# Altium PCB copper_suicide.PcbDoc (part 6 of 6)
Units mm, origin at the board's own origin, x right, y up, seen from the top; angles counter-clockwise.
Board outline 200 x 200 mm, 10 copper layers (Top Layer, Signal Layer 1, Signal Layer 2, Signal Layer 3, Signal Layer 4, Signal Layer 5, Signal Layer 6, Signal Layer 7, Signal Layer 8, Bottom Layer), stack 1.555 mm thick; 36 components, 3934 nets, 1640 pads, 0 vias.
Unrouted connection lines stored in the file: 671.
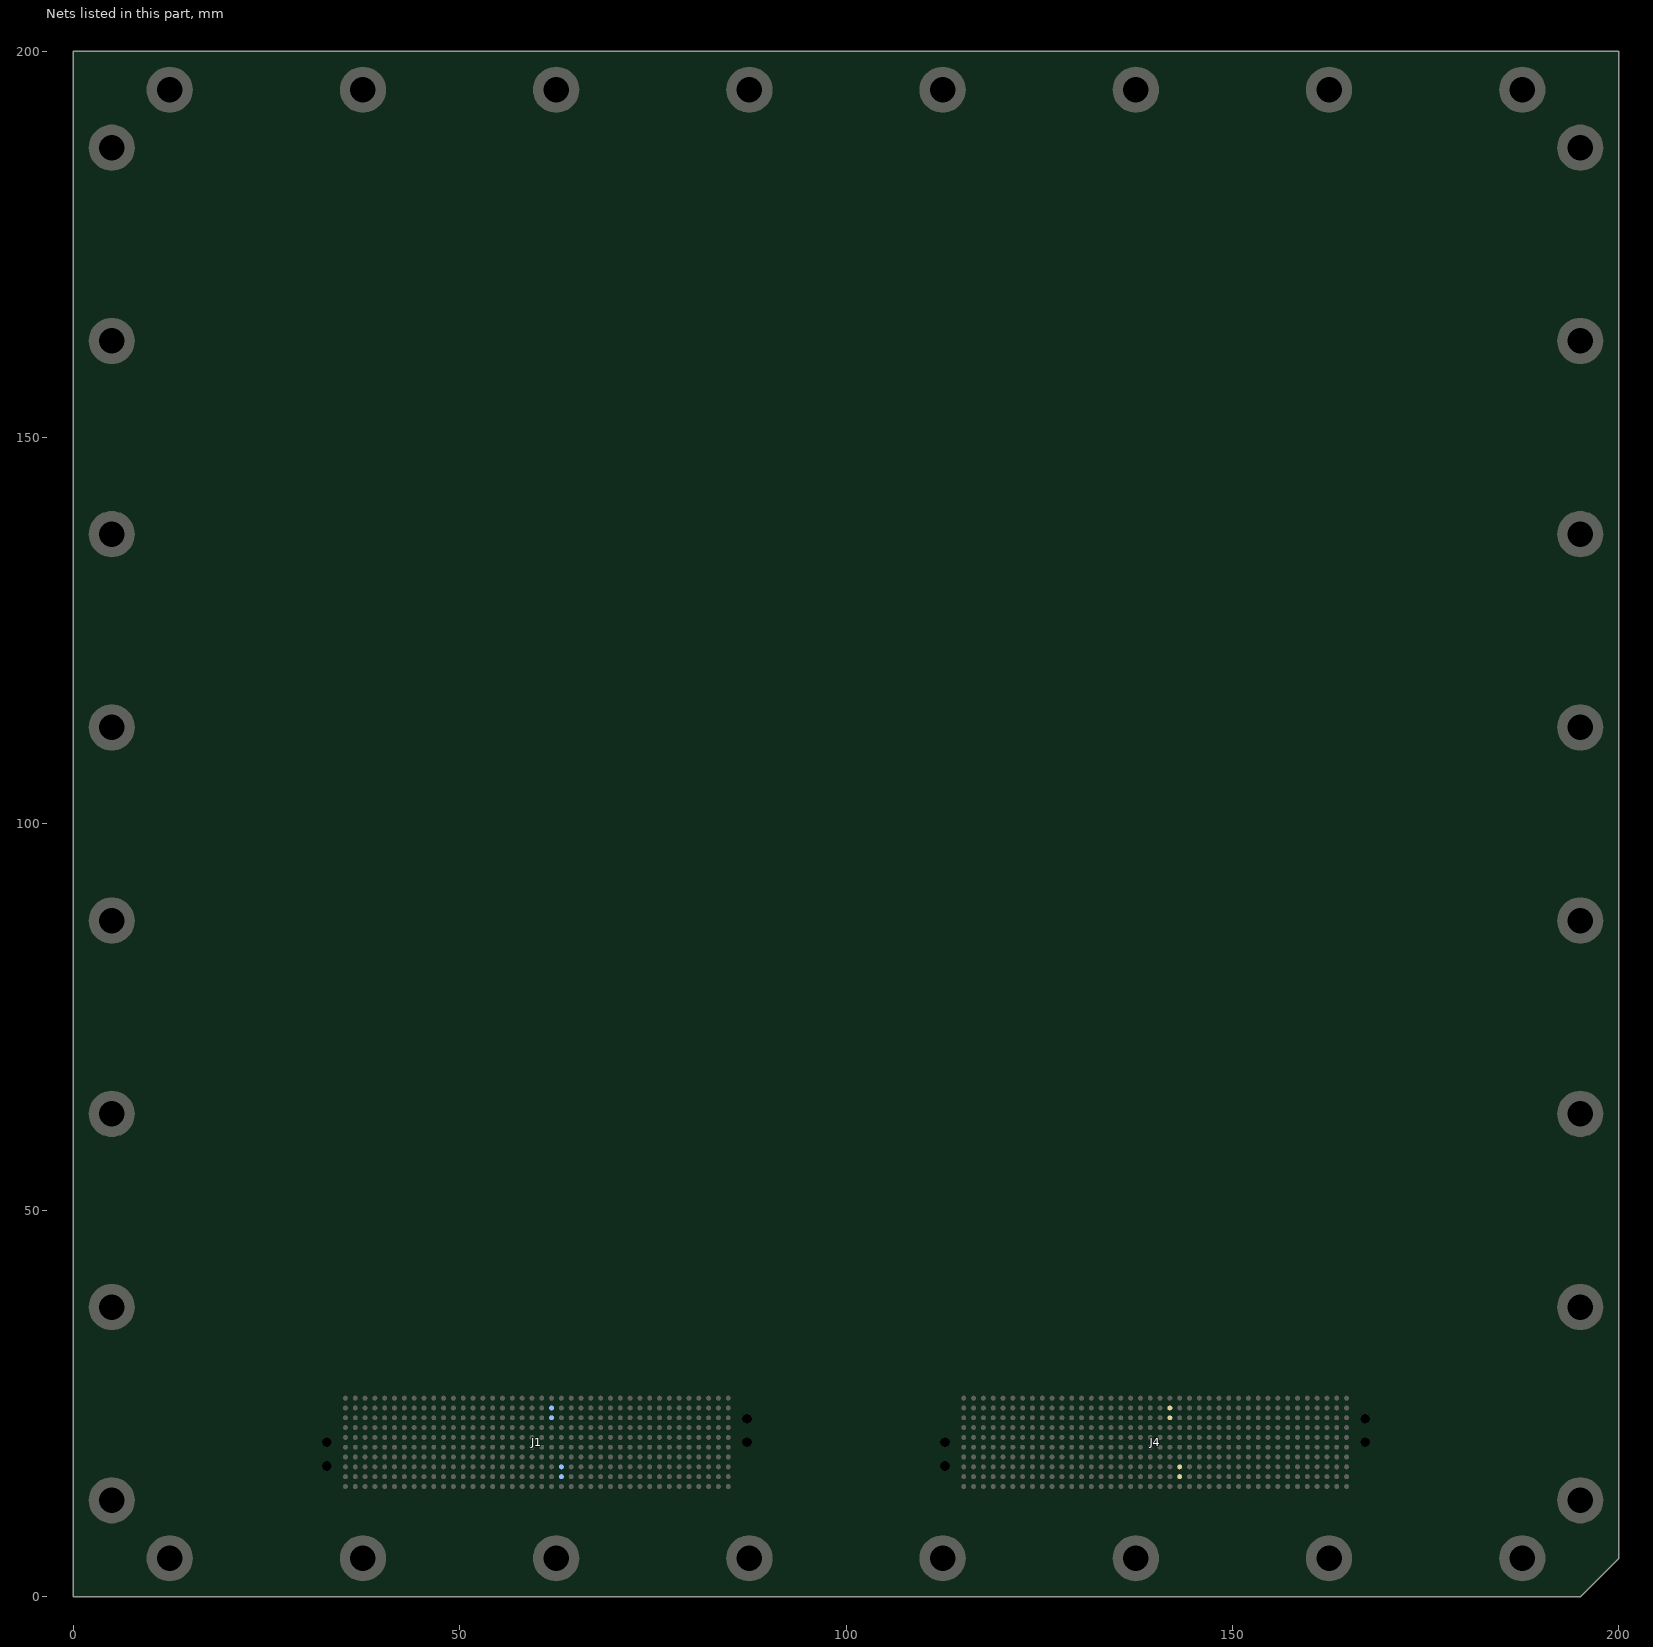
[diagram p6: the nets of this part, all layers, seen from the top]

## Nets (pads, with @x,y where several pads share a name; then routed paths per layer and width w, separated by ;. In a path a pad name is that pad's centre, name@x,y a point inside that pad or via, vN(x,y) a via of type N, cw(c..) or ccw(c..) an arc to the next point about the centre after c; other vN are vias at no path point) (continued)
L31.D5_5: 
L31.D6_5: 
L31.D7_5: 
L31.D8_5: 
L31.D9_5: 
L31.D10_5: 
L31.D11_5: 
L31.D12_5: 
L31.D13_5: 
L31.D14_5: 
L31.D15_5: 
L31.L_5_N: 
L31.L_5_P: 
L31.LDM_5: 
L31.U_5_N: 
L31.U_5_P: 
L31.UDM_5: 
L32.D0_5: 
L32.D1_5: 
L32.D2_5: 
L32.D3_5: 
L32.D4_5: 
L32.D5_5: 
L32.D6_5: 
L32.D7_5: 
L32.D8_5: 
L32.D9_5: 
L32.D10_5: 
L32.D11_5: 
L32.D12_5: 
L32.D13_5: 
L32.D14_5: 
L32.D15_5: 
L32.L_5_N: 
L32.L_5_P: 
L32.LDM_5: 
L32.U_5_N: 
L32.U_5_P: 
L32.UDM_5: 
L33.D0_5: 
L33.D1_5: 
L33.D2_5: 
L33.D3_5: 
L33.D4_5: 
L33.D5_5: 
L33.D6_5: 
L33.D7_5: 
L33.D8_5: 
L33.D9_5: 
L33.D10_5: 
L33.D11_5: 
L33.D12_5: 
L33.D13_5: 
L33.D14_5: 
L33.D15_5: 
L33.L_5_N: 
L33.L_5_P: 
L33.LDM_5: 
L33.U_5_N: 
L33.U_5_P: 
L33.UDM_5: 
LED0_35: 
LED0_37: 
LED0_56: 
LED0_57: 
LED0_58: 
LED0_59: 
LED0_60: 
LED0_61: 
LED0_62: 
LED0_63: 
LED0_64: 
LED0_65: 
LED0_66: 
LED0_67: 
LED0_68: 
LED0_69: 
LED1: 
LED1_35: 
LED1_37: 
LED1_56: 
LED1_57: 
LED1_58: 
LED1_59: 
LED1_60: 
LED1_61: 
LED1_62: 
LED1_63: 
LED1_64: 
LED1_65: 
LED1_66: 
LED1_67: 
LED1_68: 
LED1_69: 
LED2: 
LED2_35: 
LED2_37: 
LED2_56: 
LED2_57: 
LED2_58: 
LED2_59: 
LED2_60: 
LED2_61: 
LED2_62: 
LED2_63: 
LED2_64: 
LED2_65: 
LED2_66: 
LED2_67: 
LED2_68: 
LED2_69: 
LED3: 
LED3_35: 
LED3_37: 
LED3_56: 
LED3_57: 
LED3_58: 
LED3_59: 
LED3_60: 
LED3_61: 
LED3_62: 
LED3_63: 
LED3_64: 
LED3_65: 
LED3_66: 
LED3_67: 
LED3_68: 
LED3_69: 
LED4: 
LED4_35: 
LED4_37: 
LED4_56: 
LED4_57: 
LED4_58: 
LED4_59: 
LED4_60: 
LED4_61: 
LED4_62: 
LED4_63: 
LED4_64: 
LED4_65: 
LED4_66: 
LED4_67: 
LED4_68: 
LED4_69: 
LED5: 
LED5_35: 
LED5_37: 
LED5_56: 
LED5_57: 
LED5_58: 
LED5_59: 
LED5_60: 
LED5_61: 
LED5_62: 
LED5_63: 
LED5_64: 
LED5_65: 
LED5_66: 
LED5_67: 
LED5_68: 
LED5_69: 
LED6: 
LED6_35: 
LED6_37: 
LED6_56: 
LED6_57: 
LED6_58: 
LED6_59: 
LED6_60: 
LED6_61: 
LED6_62: 
LED6_63: 
LED6_64: 
LED6_65: 
LED6_66: 
LED6_67: 
LED6_68: 
LED6_69: 
LED7: 
LED7_35: 
LED7_37: 
LED7_56: 
LED7_57: 
LED7_58: 
LED7_59: 
LED7_60: 
LED7_61: 
LED7_62: 
LED7_63: 
LED7_64: 
LED7_65: 
LED7_66: 
LED7_67: 
LED7_68: 
LED7_69: 
LED8: 
LED8_35: 
LED8_37: 
LED8_56: 
LED8_57: 
LED8_58: 
LED8_59: 
LED8_60: 
LED8_61: 
LED8_62: 
LED8_63: 
LED8_64: 
LED8_65: 
LED8_66: 
LED8_67: 
LED8_68: 
LED8_69: 
LOCALCLK_35: 
LOCALCLK_37: 
LOCALCLK_56: 
LOCALCLK_57: 
LOCALCLK_58: 
LOCALCLK_59: 
LOCALCLK_60: 
LOCALCLK_61: 
LOCALCLK_62: 
LOCALCLK_63: 
LOCALCLK_64: 
LOCALCLK_65: 
LOCALCLK_66: 
LOCALCLK_67: 
LOCALCLK_68: 
LOCALCLK_69: 
MCLK.C_5_N: J4.219
MCLK.C_5_P: J4.218
MCLK_25: 
NetC5_2: 
NetC6_1: 
NetC8_1: 
NetC9_2: 
NetC17_2: 
NetC60_2: 
NetC63_1: 
NetC81_1: 
NetC81_2: 
NetC82_1: 
NetC82_2: 
NetC83_2: 
NetC88_2: 
NetC93_1: 
NetC93_2: 
NetC94_1: 
NetC95_2: 
NetC97_1: 
NetC97_2: 
NetC98_1: 
NetC98_2: 
NetC100_1: 
NetC101_1: 
NetC103_1: 
NetC104_1: 
NetC105A_2: 
NetC105B_2: 
NetC105C_2: 
NetC105D_2: 
NetC105E_2: 
NetC105F_2: 
NetC105G_2: 
NetC105H_2: 
NetC105I_2: 
NetC105J_2: 
NetC105K_2: 
NetC105L_2: 
NetC105M_2: 
NetC105N_2: 
NetC105O_2: 
NetC105P_2: 
NetC142A_1: 
NetC142B_1: 
NetC142C_1: 
NetC142D_1: 
NetC142E_1: 
NetC142F_1: 
NetC142G_1: 
NetC142H_1: 
NetC142I_1: 
NetC142J_1: 
NetC142K_1: 
NetC142L_1: 
NetC142M_1: 
NetC142N_1: 
NetC142O_1: 
NetC142P_1: 
NetC189_2: 
NetC198_2: 
NetC211_1: 
NetC212_2: 
NetC221_2: 
NetC230_2: 
NetC239_2: 
NetC248_2: 
NetC257_2: 
NetC266_2: 
NetC275_2: 
NetC284_2: 
NetC293_2: 
NetC302_2: 
NetC311_2: 
NetC320_2: 
NetC329_2: 
NetD1A_1: 
NetD1A_2: 
NetD1B_1: 
NetD1B_2: 
NetD1C_1: 
NetD1C_2: 
NetD1D_1: 
NetD1D_2: 
NetD1E_1: 
NetD1E_2: 
NetD1F_1: 
NetD1F_2: 
NetD1G_1: 
NetD1G_2: 
NetD1H_1: 
NetD1H_2: 
NetD1I_1: 
NetD1I_2: 
NetD1J_1: 
NetD1J_2: 
NetD1K_1: 
NetD1K_2: 
NetD1L_1: 
NetD1L_2: 
NetD1M_1: 
NetD1M_2: 
NetD1N_1: 
NetD1N_2: 
NetD1O_1: 
NetD1O_2: 
NetD1P_1: 
NetD1P_2: 
NetD1Q_1: 
NetD1Q_2: 
NetD2A_1: 
NetD2A_2: 
NetD2B_1: 
NetD2B_2: 
NetD2C_1: 
NetD2C_2: 
NetD2D_1: 
NetD2D_2: 
NetD2E_1: 
NetD2E_2: 
NetD2F_1: 
NetD2F_2: 
NetD2G_1: 
NetD2G_2: 
NetD2H_1: 
NetD2H_2: 
NetD2I_1: 
NetD2I_2: 
NetD2J_1: 
NetD2J_2: 
NetD2K_1: 
NetD2K_2: 
NetD2L_1: 
NetD2L_2: 
NetD2M_1: 
NetD2M_2: 
NetD2N_1: 
NetD2N_2: 
NetD2O_1: 
NetD2O_2: 
NetD2P_1: 
NetD2P_2: 
NetD2Q_1: 
NetD2Q_2: 
NetD3A_1: 
NetD3A_2: 
NetD3B_1: 
NetD3B_2: 
NetD3C_1: 
NetD3C_2: 
NetD3D_1: 
NetD3D_2: 
NetD3E_1: 
NetD3E_2: 
NetD3F_1: 
NetD3F_2: 
NetD3G_1: 
NetD3G_2: 
NetD3H_1: 
NetD3H_2: 
NetD3I_1: 
NetD3I_2: 
NetD3J_1: 
NetD3J_2: 
NetD3K_1: 
NetD3K_2: 
NetD3L_1: 
NetD3L_2: 
NetD3M_1: 
NetD3M_2: 
NetD3N_1: 
NetD3N_2: 
NetD3O_1: 
NetD3O_2: 
NetD3P_1: 
NetD3P_2: 
NetD3Q_1: 
NetD3Q_2: 
NetD4A_1: 
NetD4A_2: 
NetD4B_1: 
NetD4B_2: 
NetD4C_1: 
NetD4C_2: 
NetD4D_1: 
NetD4D_2: 
NetD4E_1: 
NetD4E_2: 
NetD4F_1: 
NetD4F_2: 
NetD4G_1: 
NetD4G_2: 
NetD4H_1: 
NetD4H_2: 
NetD4I_1: 
NetD4I_2: 
NetD4J_1: 
NetD4J_2: 
NetD4K_1: 
NetD4K_2: 
NetD4L_1: 
NetD4L_2: 
NetD4M_1: 
NetD4M_2: 
NetD4N_1: 
NetD4N_2: 
NetD4O_1: 
NetD4O_2: 
NetD4P_1: 
NetD4P_2: 
NetD4Q_1: 
NetD4Q_2: 
NetD5A_1: 
NetD5A_2: 
NetD5B_1: 
NetD5B_2: 
NetD5C_1: 
NetD5C_2: 
NetD5D_1: 
NetD5D_2: 
NetD5E_1: 
NetD5E_2: 
NetD5F_1: 
NetD5F_2: 
NetD5G_1: 
NetD5G_2: 
NetD5H_1: 
NetD5H_2: 
NetD5I_1: 
NetD5I_2: 
NetD5J_1: 
NetD5J_2: 
NetD5K_1: 
NetD5K_2: 
NetD5L_1: 
NetD5L_2: 
NetD5M_1: 
NetD5M_2: 
NetD5N_1: 
NetD5N_2: 
NetD5O_1: 
NetD5O_2: 
NetD5P_1: 
NetD5P_2: 
NetD5Q_1: 
NetD5Q_2: 
NetD6A_1: 
NetD6A_2: 
NetD6B_1: 
NetD6B_2: 
NetD6C_1: 
NetD6C_2: 
NetD6D_1: 
NetD6D_2: 
NetD6E_1: 
NetD6E_2: 
NetD6F_1: 
NetD6F_2: 
NetD6G_1: 
NetD6G_2: 
NetD6H_1: 
NetD6H_2: 
NetD6I_1: 
NetD6I_2: 
NetD6J_1: 
NetD6J_2: 
NetD6K_1: 
NetD6K_2: 
NetD6L_1: 
NetD6L_2: 
NetD6M_1: 
NetD6M_2: 
NetD6N_1: 
NetD6N_2: 
NetD6O_1: 
NetD6O_2: 
NetD6P_1: 
NetD6P_2: 
NetD6Q_1: 
NetD6Q_2: 
NetD7A_1: 
NetD7A_2: 
NetD7B_1: 
NetD7B_2: 
NetD7C_1: 
NetD7C_2: 
NetD7D_1: 
NetD7D_2: 
NetD7E_1: 
NetD7E_2: 
NetD7F_1: 
NetD7F_2: 
NetD7G_1: 
NetD7G_2: 
NetD7H_1: 
NetD7H_2: 
NetD7I_1: 
NetD7I_2: 
NetD7J_1: 
NetD7J_2: 
NetD7K_1: 
NetD7K_2: 
NetD7L_1: 
NetD7L_2: 
NetD7M_1: 
NetD7M_2: 
NetD7N_1: 
NetD7N_2: 
NetD7O_1: 
NetD7O_2: 
NetD7P_1: 
NetD7P_2: 
NetD7Q_1: 
NetD7Q_2: 
NetD8A_1: 
NetD8A_2: 
NetD8B_1: 
NetD8B_2: 
NetD8C_1: 
NetD8C_2: 
NetD8D_1: 
NetD8D_2: 
NetD8E_1: 
NetD8E_2: 
NetD8F_1: 
NetD8F_2: 
NetD8G_1: 
NetD8G_2: 
NetD8H_1: 
NetD8H_2: 
NetD8I_1: 
NetD8I_2: 
NetD8J_1: 
NetD8J_2: 
NetD8K_1: 
NetD8K_2: 
NetD8L_1: 
NetD8L_2: 
NetD8M_1: 
NetD8M_2: 
NetD8N_1: 
NetD8N_2: 
NetD8O_1: 
NetD8O_2: 
NetD8P_1: 
NetD8P_2: 
NetD8Q_1: 
NetD8Q_2: 
NetF2_2: 
NetL3_1: 
NetL6A_1: 
NetL6B_1: 
NetL6C_1: 
NetL6D_1: 
NetL6E_1: 
NetL6F_1: 
NetL6G_1: 
NetL6H_1: 
NetL6I_1: 
NetL6J_1: 
NetL6K_1: 
NetL6L_1: 
NetL6M_1: 
NetL6N_1: 
NetL6O_1: 
NetL6P_1: 
NetL7_1: 
NetNT1_2: 
NetQ1_4: 
NetR14_1: 
NetR18_1: 
NetR19_1: 
NetR20_1: 
NetR29_1: 
NetR32_2: 
NetR34_2: 
NetR38_1: 
NetR39_1: 
NetR41_1: 
NetR52_1: 
NetR60A_1: 
NetR60B_1: 
NetR60C_1: 
NetR60D_1: 
NetR60E_1: 
NetR60F_1: 
NetR60G_1: 
NetR60H_1: 
NetR60I_1: 
NetR60J_1: 
NetR60K_1: 
NetR60L_1: 
NetR60M_1: 
NetR60N_1: 
NetR60O_1: 
NetR60P_1: 
NetR62_2: 
NetR71_1: 
NetR72_1: 
NetR73_1: 
NetR78_2: 
NetR87_1: 
NetR88_1: 
NetR89_1: 
NetR106_2: 
NetR115_1: 
NetR116_1: 
NetR117_1: 
NetR122_2: 
NetR131_1: 
NetR132_1: 
NetR133_1: 
NetR138_2: 
NetR147_1: 
NetR148_1: 
NetR149_1: 
NetR154_2: 
NetR163_1: 
NetR164_1: 
NetR165_1: 
NetR170_2: 
NetR179_1: 
NetR180_1: 
NetR181_1: 
NetR186_2: 
NetR195_1: 
NetR196_1: 
NetR197_1: 
NetR202_2: 
NetR211_1: 
NetR212_1: 
NetR213_1: 
NetR218_2: 
NetR227_1: 
NetR228_1: 
NetR229_1: 
NetR234_2: 
NetR243_1: 
NetR244_1: 
NetR245_1: 
NetR250_2: 
NetR259_1: 
NetR260_1: 
NetR261_1: 
NetR266_2: 
NetR275_1: 
NetR276_1: 
NetR277_1: 
NetR282_2: 
NetR291_1: 
NetR292_1: 
NetR293_1: 
NetR298_2: 
NetR307_1: 
NetR308_1: 
NetR309_1: 
NetR314_2: 
NetR323_1: 
NetR324_1: 
NetR325_1: 
NetU4_AK5: 
NetU4_AM5: 
OBCLK_17_N: 
OBCLK_17_P: 
ONBDOSCEN: 
PGOOD-5V_33: 
PROGN_5: J1.222
RFB: 
RST00_5_N: 
RST01_5_N: 
RST02_5_N: 
RST03_5_N: 
RST10_5_N: 
RST11_5_N: 
RST12_5_N: 
RST13_5_N: 
RST20_5_N: 
RST21_5_N: 
RST22_5_N: 
RST23_5_N: 
RST30_5_N: 
RST31_5_N: 
RST32_5_N: 
RST33_5_N: 
RSTI2_5_N: 
RSTI_5_N: J4.222
RSTO.RST16_5: J1.223
SCLK.C_5_N: J1.219
SCLK.C_5_P: J1.218
SOFT-RESET_6: J4.223
TPSVDD_33: 
U00.D0_5: 
U00.D1_5: 
U00.D2_5: 
U00.D3_5: 
U00.D4_5: 
U00.D5_5: 
U00.D6_5: 
U00.D7_5: 
U00.D8_5: 
U00.D9_5: 
U00.D10_5: 
U00.D11_5: 
U00.D12_5: 
U00.D13_5: 
U00.D14_5: 
U00.D15_5: 
U00.L_5_N: 
U00.L_5_P: 
U00.LDM_5: 
U00.U_5_N: 
U00.U_5_P: 
U00.UDM_5: 
U01.D0_5: 
U01.D1_5: 
U01.D2_5: 
U01.D3_5: 
U01.D4_5: 
U01.D5_5: 
U01.D6_5: 
U01.D7_5: 
U01.D8_5: 
U01.D9_5: 
U01.D10_5: 
U01.D11_5: 
U01.D12_5: 
U01.D13_5: 
U01.D14_5: 
U01.D15_5: 
U01.L_5_N: 
U01.L_5_P: 
U01.LDM_5: 
U01.U_5_N: 
U01.U_5_P: 
U01.UDM_5: 
U02.D0_5: 
U02.D1_5: 
U02.D2_5: 
U02.D3_5: 
U02.D4_5: 
U02.D5_5: 
U02.D6_5: 
U02.D7_5: 
U02.D8_5: 
U02.D9_5: 
U02.D10_5: 
U02.D11_5: 
U02.D12_5: 
U02.D13_5: 
U02.D14_5: 
U02.D15_5: 
U02.L_5_N: 
U02.L_5_P: 
U02.LDM_5: 
U02.U_5_N: 
U02.U_5_P: 
U02.UDM_5: 
U03.D0_5: 
U03.D1_5: 
U03.D2_5: 
U03.D3_5: 
U03.D4_5: 
U03.D5_5: 
U03.D6_5: 
U03.D7_5: 
U03.D8_5: 
U03.D9_5: 
U03.D10_5: 
U03.D11_5: 
U03.D12_5: 
U03.D13_5: 
U03.D14_5: 
U03.D15_5: 
U03.L_5_N: 
U03.L_5_P: 
U03.LDM_5: 
U03.U_5_N: 
U03.U_5_P: 
U03.UDM_5: 
U30.D0_5: 
U30.D1_5: 
U30.D2_5: 
U30.D3_5: 
U30.D4_5: 
U30.D5_5: 
U30.D6_5: 
U30.D7_5: 
U30.D8_5: 
U30.D9_5: 
U30.D10_5: 
U30.D11_5: 
U30.D12_5: 
U30.D13_5: 
U30.D14_5: 
U30.D15_5: 
U30.L_5_N: 
U30.L_5_P: 
U30.LDM_5: 
U30.U_5_N: 
U30.U_5_P: 
U30.UDM_5: 
U31.D0_5: 
U31.D1_5: 
U31.D2_5: 
U31.D3_5: 
U31.D4_5: 
U31.D5_5: 
U31.D6_5: 
U31.D7_5: 
U31.D8_5: 
U31.D9_5: 
U31.D10_5: 
U31.D11_5: 
U31.D12_5: 
U31.D13_5: 
U31.D14_5: 
U31.D15_5: 
U31.L_5_N: 
U31.L_5_P: 
U31.LDM_5: 
U31.U_5_N: 
U31.U_5_P: 
U31.UDM_5: 
U32.D0_5: 
U32.D1_5: 
U32.D2_5: 
U32.D3_5: 
U32.D4_5: 
U32.D5_5: 
U32.D6_5: 
U32.D7_5: 
U32.D8_5: 
U32.D9_5: 
U32.D10_5: 
U32.D11_5: 
U32.D12_5: 
U32.D13_5: 
U32.D14_5: 
U32.D15_5: 
U32.L_5_N: 
U32.L_5_P: 
U32.LDM_5: 
U32.U_5_N: 
U32.U_5_P: 
U32.UDM_5: 
U33.D0_5: 
U33.D1_5: 
U33.D2_5: 
U33.D3_5: 
U33.D4_5: 
U33.D5_5: 
U33.D6_5: 
U33.D7_5: 
U33.D8_5: 
U33.D9_5: 
U33.D10_5: 
U33.D11_5: 
U33.D12_5: 
U33.D13_5: 
U33.D14_5: 
U33.D15_5: 
U33.L_5_N: 
U33.L_5_P: 
U33.LDM_5: 
U33.U_5_N: 
U33.U_5_P: 
U33.UDM_5: 
V0V75: 
V2V5: 
V3V3: 
V5LDO: 
V12: 
V48: 
VDDR: 
VIN48V: 
VOUT: 
ZQA: 
ZQB: 
ZQC: 
ZQD: 
ZQE: 
ZQF: 
ZQG: 
ZQH: 
ZQI: 
ZQJ: 
ZQK: 
ZQL: 
ZQM: 
ZQN: 
ZQO: 
ZQP: 
pads on no net: J1.3 J1.79 J1.119 J1.122 J1.123 J1.125 J1.126 J1.128 J1.129 J1.132 J1.133 J1.135 J1.136 J1.138 J1.139 J1.142 J1.143 J1.145 J1.146 J1.148 J1.149 J1.152 J1.153 J1.155 J1.156 J1.158 J1.159 J1.162 J1.163 J1.165 J1.166 J1.168 J1.169 J1.172 J1.173 J1.175 J1.176 J1.178 J1.179 J1.182 J1.183 J1.185 J1.186 J1.188 J1.189 J1.192 J1.193 J1.195 J1.196 J1.198 J1.199 J1.209 J1.319 J1.399 J1.401 J1.402 J2.3 J2.79 J2.119 J2.122 J2.123 J2.125 J2.126 J2.128 J2.129 J2.132 J2.133 J2.135 J2.136 J2.138 J2.139 J2.142 J2.143 J2.145 J2.146 J2.148 J2.149 J2.152 J2.153 J2.155 J2.156 J2.158 J2.159 J2.162 J2.163 J2.165 J2.166 J2.168 J2.169 J2.172 J2.173 J2.175 J2.176 J2.178 J2.179 J2.182 J2.183 J2.185 J2.186 J2.188 J2.189 J2.192 J2.193 J2.195 J2.196 J2.198 J2.199 J2.203 J2.279 J2.319 J2.322 J2.323 J2.325 J2.326 J2.328 J2.329 J2.332 J2.333 J2.335 J2.336 J2.338 J2.339 J2.342 J2.343 J2.345 J2.346 J2.348 J2.349 J2.352 J2.353 J2.355 J2.356 J2.358 J2.359 J2.362 J2.363 J2.365 J2.366 J2.368 J2.369 J2.372 J2.373 J2.375 J2.376 J2.378 J2.379 J2.382 J2.383 J2.385 J2.386 J2.388 J2.389 J2.392 J2.393 J2.395 J2.396 J2.398 J2.399 J2.401 J2.402 J3.39 J3.119 J3.122 J3.123 J3.125 J3.126 J3.128 J3.129 J3.132 J3.133 J3.135 J3.136 J3.138 J3.139 J3.142 J3.143 J3.145 J3.146 J3.148 J3.149 J3.152 J3.153 J3.155 J3.156 J3.158 J3.159 J3.162 J3.163 J3.165 J3.166 J3.168 J3.169 J3.172 J3.173 J3.175 J3.176 J3.178 J3.179 J3.182 J3.183 J3.185 J3.186 J3.188 J3.189 J3.192 J3.193 J3.195 J3.196 J3.198 J3.199 J3.279 J3.319 J3.322 J3.323 J3.325 J3.326 J3.328 J3.329 J3.332 J3.333 J3.335 J3.336 J3.338 J3.339 J3.342 J3.343 J3.345 J3.346 J3.348 J3.349 J3.352 J3.353 J3.355 J3.356 J3.358 J3.359 J3.362 J3.363 J3.365 J3.366 J3.368 J3.369 J3.372 J3.373 J3.375 J3.376 J3.378 J3.379 J3.382 J3.383 J3.385 J3.386 J3.388 J3.389 J3.392 J3.393 J3.395 J3.396 J3.398 J3.399 J3.401 J3.402 J4.79 J4.119 J4.122 J4.123 J4.125 J4.126 J4.128 J4.129 J4.132 J4.133 J4.135 J4.136 J4.138 J4.139 J4.142 J4.143 J4.145 J4.146 J4.148 J4.149 J4.152 J4.153 J4.155 J4.156 J4.158 J4.159 J4.162 J4.163 J4.165 J4.166 J4.168 J4.169 J4.172 J4.173 J4.175 J4.176 J4.178 J4.179 J4.182 J4.183 J4.185 J4.186 J4.188 J4.189 J4.192 J4.193 J4.195 J4.196 J4.198 J4.199 J4.209 J4.319 J4.399 J4.401 J4.402

## Polygon pours and split planes (outlines as drawn)
GND on Top Layer "TOP-GND-MOUNT" (solid, remove dead copper, pour order 10): 0,200 12.929,187.071 ccw(c20,180) 10,180 10,20 ccw(c20,20) 12.929,12.929 0,0
GND on Top Layer "TOP-GND-MOUNT" (solid, remove dead copper, pour order 12): 200,200 187.071,187.071 ccw(c180,180) 180,190 20,190 ccw(c20,180) 12.929,187.071 0,200
GND on Top Layer "TOP-GND-MOUNT" (solid, remove dead copper, pour order 14): 200,0 187.071,12.929 ccw(c180,20) 190,20 190,180 ccw(c180,180) 187.071,187.071 200,200
GND on Top Layer "TOP-GND-MOUNT" (solid, remove dead copper, pour order 16): 0,0 12.929,12.929 ccw(c20,20) 20,10 180,10 ccw(c180,20) 187.071,12.929 200,0
GND on Bottom Layer "BOT-GND-MOUNT" (solid, remove dead copper, pour order 8): 0,200 12.929,187.071 ccw(c20,180) 10,180 10,20 ccw(c20,20) 12.929,12.929 0,0
GND on Bottom Layer "BOT-GND-MOUNT" (solid, remove dead copper, pour order 6): 200,200 187.071,187.071 ccw(c180,180) 180,190 20,190 ccw(c20,180) 12.929,187.071 0,200
GND on Bottom Layer "BOT-GND-MOUNT" (solid, remove dead copper, pour order 4): 200,0 187.071,12.929 ccw(c180,20) 190,20 190,180 ccw(c180,180) 187.071,187.071 200,200
GND on Bottom Layer "BOT-GND-MOUNT" (solid, remove dead copper, pour order 2): 0,0 12.929,12.929 ccw(c20,20) 20,10 180,10 ccw(c180,20) 187.071,12.929 200,0

## Keep-outs
Keep-Out Layer:
  the board outline again, w0.508

## Silkscreen, mask and mechanical layers (free items; w line width, h text height)
Top Solder:
  region: 0,200 13,187 ccw(c20,180) 10.1,180 10.1,20 ccw(c20,20) 13,13 0,0
  region: 200,200 187,187 ccw(c180,180) 180,189.9 20,189.9 ccw(c20,180) 13,187 0,200
  region: 200,200 200,5 197.5,2.5 187,13 ccw(c180,20) 189.9,20 189.9,180 ccw(c180,180) 187,187
  region: 0,0 195,0 197.5,2.5 187,13 cw(c180,20) 180,10.1 20,10.1 cw(c20,20) 13,13
Bottom Solder:
  region: 0,200 13,187 ccw(c20,180) 10.1,180 10.1,20 ccw(c20,20) 13,13 0,0
  region: 200,200 187,187 ccw(c180,180) 180,189.9 20,189.9 ccw(c20,180) 13,187 0,200
  region: 200,200 200,5 197.5,2.5 187,13 ccw(c180,20) 189.9,20 189.9,180 ccw(c180,180) 187,187
  region: 0,0 195,0 197.5,2.5 187,13 cw(c180,20) 180,10.1 20,10.1 cw(c20,20) 13,13
Mechanical 1:
  lines w0.2: 57.5,20 62.5,20 ; 57.5,180 62.5,180 ; 60,17.5 60,22.5 ; 60,177.5 60,182.5 ; 137.5,20 142.5,20 ; 137.5,180 142.5,180 ; 140,17.5 140,22.5 ; 140,177.5 140,182.5
Mechanical 2:
  lines w0.254: 0,0 0,200 200,200 200,5 197.5,2.5 195,0 0,0 ; 187,13 187,13
Mechanical 16:
  drawing of 777 lines, arcs and shapes, not listed
  text "1" at -23.676,218.971 h1.78
  text "2" at 46.191,218.971 h1.78
  text "3" at 115.914,218.971 h1.78
  text "4" at 185.789,218.971 h1.78
  text "REV" at 255.69,213.51 h1.7
  text "DATE" at 270.93,213.51 h1.7
  text "DESC" at 283.63,213.51 h1.7
  text "ENG" at 354.75,213.51 h1.7
  text "1" at 255.69,208.43 h1.7
  text "*" at 270.93,208.43 h1.7
  text "INITIAL RELEASE" at 283.63,208.43 h1.7
  text "*" at 354.75,208.43 h1.7
  text "A" at -56.095,129.614 h1.78
  text "A" at 370.625,129.614 h1.78
  text "B" at -56.095,75.639 h1.78
  text "B" at 370.625,75.639 h1.78
  text "C" at -56.095,21.664 h1.78
  text "C" at 370.625,21.664 h1.78
  text "ENGINEER:" at 255.69,-23.98 h1.14
  text "TITLE:" at 293.79,-23.98 h1.14
  text "ALL DIMENSIONS ARE IN MM (INCHES)" at 185.205,-25.885 h1.2
  text "Brinton Engineering LLC" at 221.4,-25.885 h1.78
  text "*" at 255.69,-27.155 h1.78
  text "4 Avocet Drive 209" at 221.4,-28.425 h1.78
  text "TOLERANCES:" at 196.254,-30.076 h1.2
  text "Redwood City CA 94065" at 221.4,-30.965 h1.78
  text "*" at 294.425,-30.965 h2.2
  text "PCB DESIGNER:" at 255.69,-31.473 h1.14
  text "D" at -56.095,-32.184 h1.78
  text "D" at 370.625,-32.184 h1.78
  text "DECIMALS" at 185.205,-32.87 h1.2
  text "(858) 414 1421" at 221.4,-33.505 h1.78
  text "*" at 255.69,-34.775 h1.78
  text ".X     0.1" at 185.205,-36.045 h1.2
  text ".XX    0.05" at 185.205,-38.585 h1.2
  text "DATE:" at 255.69,-39.22 h1.14
  text "PART NO.:" at 293.79,-39.22 h1.14
  text "REV:" at 347.13,-39.22 h1.14
  text ".XXX   0.005" at 185.205,-41.125 h1.2
  text "*" at 255.69,-42.395 h1.7
  text "-" at 293.79,-42.395 h1.78
  text "1" at 347.13,-42.395 h1.78
  text "*UNLESS OTHERWISE NOTED" at 184.57,-46.84 h1.2
  text "FILE NAME:" at 255.69,-46.84 h1.14
  text "DWG NO:" at 293.79,-46.84 h1.14
  text "SCALE:" at 347.13,-46.84 h1.14
  text ".PCB_FILE_NAME_NO_PATH" at 256.96,-49.888 h1.78
  text "-" at 293.79,-50.015 h1.78
  text "1:1" at 347.13,-50.015 h1.78
  text "1" at -23.676,-55.349 h1.78
  text "2" at 46.191,-55.349 h1.78
  text "3" at 115.914,-55.349 h1.78
  text "4" at 185.789,-55.349 h1.78
Drill Drawing:
  lines w0.125: 269.77,122.78 271.04,124.05 ; 269.77,125.32 271.04,126.59 ; 271.04,122.78 272.31,124.05 ; 271.04,125.32 272.31,126.59 ; 272.31,122.78 273.58,124.05 ; 272.31,125.32 273.58,126.59 ; 273.58,122.78 274.85,124.05 ; 273.58,125.32 274.85,126.59 ; 274.85,122.78 276.12,124.05 ; 274.85,125.32 276.12,126.59 ; 276.12,122.78 277.39,124.05 ; 276.12,125.32 277.39,126.59 ; 277.39,122.78 278.66,124.05 ; 277.39,125.32 278.66,126.59 ; 278.66,122.78 279.93,124.05 ; 278.66,125.32 279.93,126.59 ; 279.93,122.78 281.2,124.05 ; 279.93,125.32 281.2,126.59 ; 281.2,122.78 282.47,124.05 ; 281.2,125.32 282.47,126.59
  lines w0.254: 240.56,115.795 240.56,138.02 ; 240.56,115.875 309.14,115.875 309.14,113.335 308.505,113.335 285.01,113.335 285.01,115.875 ; 240.56,118.335 309.14,118.335 ; 240.56,120.875 309.14,120.875 ; 240.56,123.415 268.5,123.415 ; 240.56,125.955 268.5,125.955 ; 240.56,128.495 309.14,128.495 ; 240.56,131.035 309.14,131.035 ; 253.26,115.795 253.26,138.02 ; 269.77,132.94 269.77,131.67 282.47,131.67 282.47,132.94 ; 270.024,117.319 270.278,117.319 ; 270.024,132.559 270.278,132.559 ; 270.786,116.811 271.04,116.811 ; 270.786,132.051 271.04,132.051 ; 271.04,124.177 281.2,124.177 ; 271.04,124.431 281.2,124.431 ; 271.04,124.685 281.2,124.685 ; 271.04,124.812 281.2,124.812 ; 271.04,125.066 281.2,125.066 ; 271.04,125.32 271.04,124.05 ; 271.548,117.319 271.802,117.319 ; 271.548,132.559 271.802,132.559 ; 272.31,116.811 272.564,116.811 ; 272.31,132.051 272.564,132.051 ; 273.072,117.319 273.326,117.319 ; 273.072,132.559 273.326,132.559 ; 273.834,116.811 274.088,116.811 ; 273.834,132.051 274.088,132.051 ; 274.596,117.319 274.85,117.319 ; 274.596,132.559 274.85,132.559 ; 275.358,116.811 275.612,116.811 ; 275.358,132.051 275.612,132.051 ; 276.12,117.319 276.374,117.319 ; 276.12,132.559 276.374,132.559 ; 276.882,116.811 277.136,116.811 ; 276.882,132.051 277.136,132.051 ; 277.644,117.319 277.898,117.319 ; 277.644,132.559 277.898,132.559 ; 278.406,116.811 278.66,116.811 ; 278.406,132.051 278.66,132.051 ; 279.168,117.319 279.422,117.319 ; 279.168,132.559 279.422,132.559 ; 279.93,116.811 280.184,116.811 ; 279.93,132.051 280.184,132.051 ; 280.692,117.319 280.946,117.319 ; 280.692,132.559 280.946,132.559 ; 281.2,125.32 281.2,124.05 ; 281.454,116.811 281.708,116.811 ; 281.454,132.051 281.708,132.051 ; 282.216,117.319 282.47,117.319 ; 282.216,132.559 282.47,132.559 ; 285.01,115.795 285.01,138.02 ; 285.01,123.415 309.14,123.415 ; 285.01,125.955 309.14,125.955 ; 309.14,115.795 309.14,138.02 ; 318.64,-40.598 387.22,-40.598 ; 318.64,-36.788 387.22,-36.788 ; 347.85,-41.868 360.55,-41.868 ; 271.04,124.05 281.2,124.05 ; 271.04,124.05 269.77,124.05 269.77,122.78 282.47,122.78 282.47,124.05 281.2,124.05 ; 269.77,116.43 269.77,117.7 282.47,117.7 282.47,116.43 269.77,116.43 ; 269.77,118.97 269.77,120.24 282.47,120.24 282.47,118.97 269.77,118.97 ; 269.77,125.32 269.77,126.59 282.47,126.59 282.47,125.32 269.77,125.32 ; 269.77,129.13 282.47,129.13 282.47,130.4 269.77,130.4 269.77,129.13
  text "SILK SCREEN" at 254.53,131.67 h1.14
  text "SOLDER MASK" at 254.53,129.13 h1.14
  text "1 (TOP) S" at 241.83,126.59 h1.14
  text "COPPER (1oz.)" at 254.53,126.59 h1.14
  text "0.036 (0.0014)" at 285.645,126.59 h1.14
  text "PHENOLIC (FR-4)" at 254.53,124.05 h1.14
  text "1.57 (0.062)" at 285.645,124.05 h1.14
  text "2 (BOT) S" at 241.83,121.51 h1.14
  text "COPPER (1oz.)" at 254.53,121.51 h1.14
  text "0.036 (0.0014)" at 285.645,121.51 h1.14
  text "SOLDER MASK" at 254.53,118.97 h1.14
  text "SILK SCREEN" at 254.53,116.43 h1.14
  text "TOTAL" at 279.93,113.97 h1.14
  text "1.65 (0.065)" at 285.645,113.97 h1.14
  text "1. LEAD-FREE HASL" at 319.91,-21.228 h1.14
  text ".Legend" at -41.49,-22.075 h1.2
  text "2. SOLDERMASK: GREEN" at 319.91,-23.768 h1.14
  text "3. SILKSCREEN: WHITE" at 319.91,-26.308 h1.14
  text "4. NO BOTTOM SOLDERMASK" at 319.91,-28.848 h1.14
  text "LAYER" at 319.91,-39.328 h1.14
  text "FINISH" at 364.36,-39.328 h1.14